# Altium PCB max10_layout.PcbDoc
Units mm, origin at the board's own origin, x right, y up, seen from the top; angles counter-clockwise.
Board outline 43 x 30 mm, 2 copper layers (Top Layer, Bottom Layer); 21 components, 17 nets, 79 pads, 86 vias.
Unrouted connection lines stored in the file: 2.
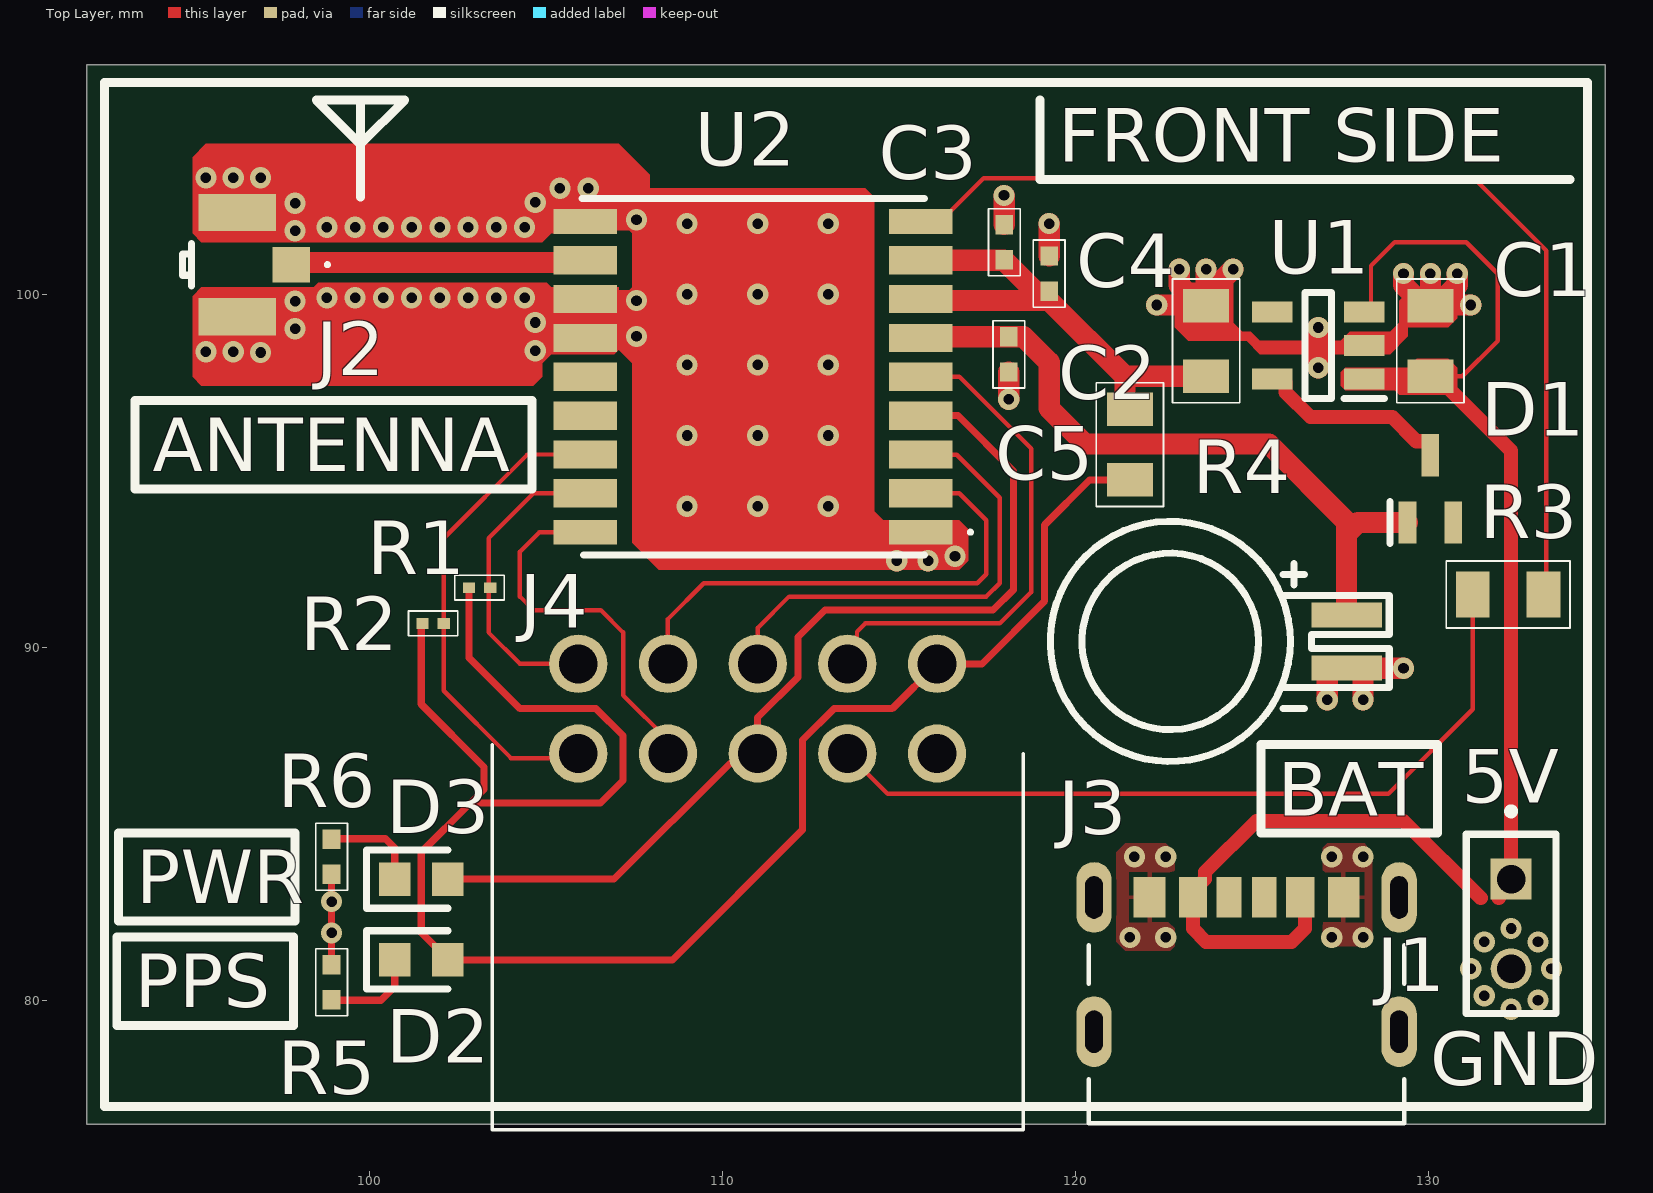
[diagram p0: Top Layer view]
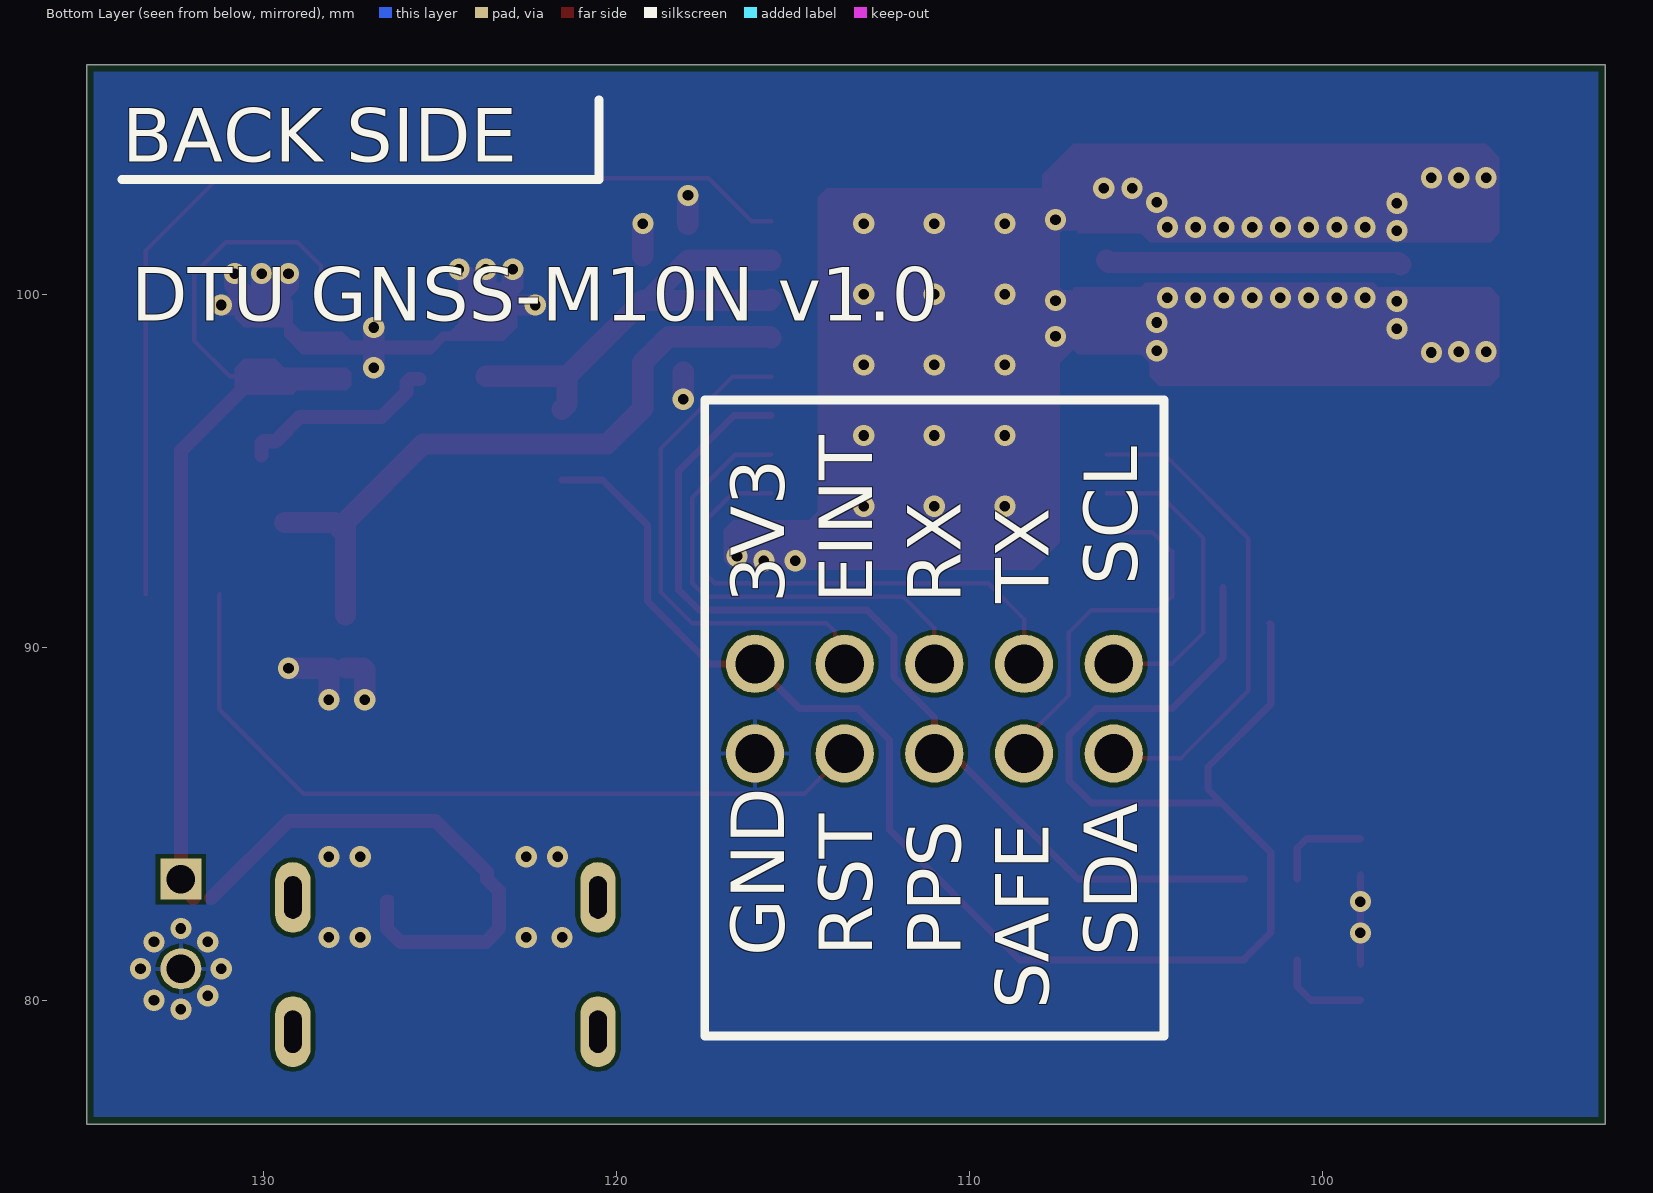
[diagram p1: Bottom Layer view, seen from below]
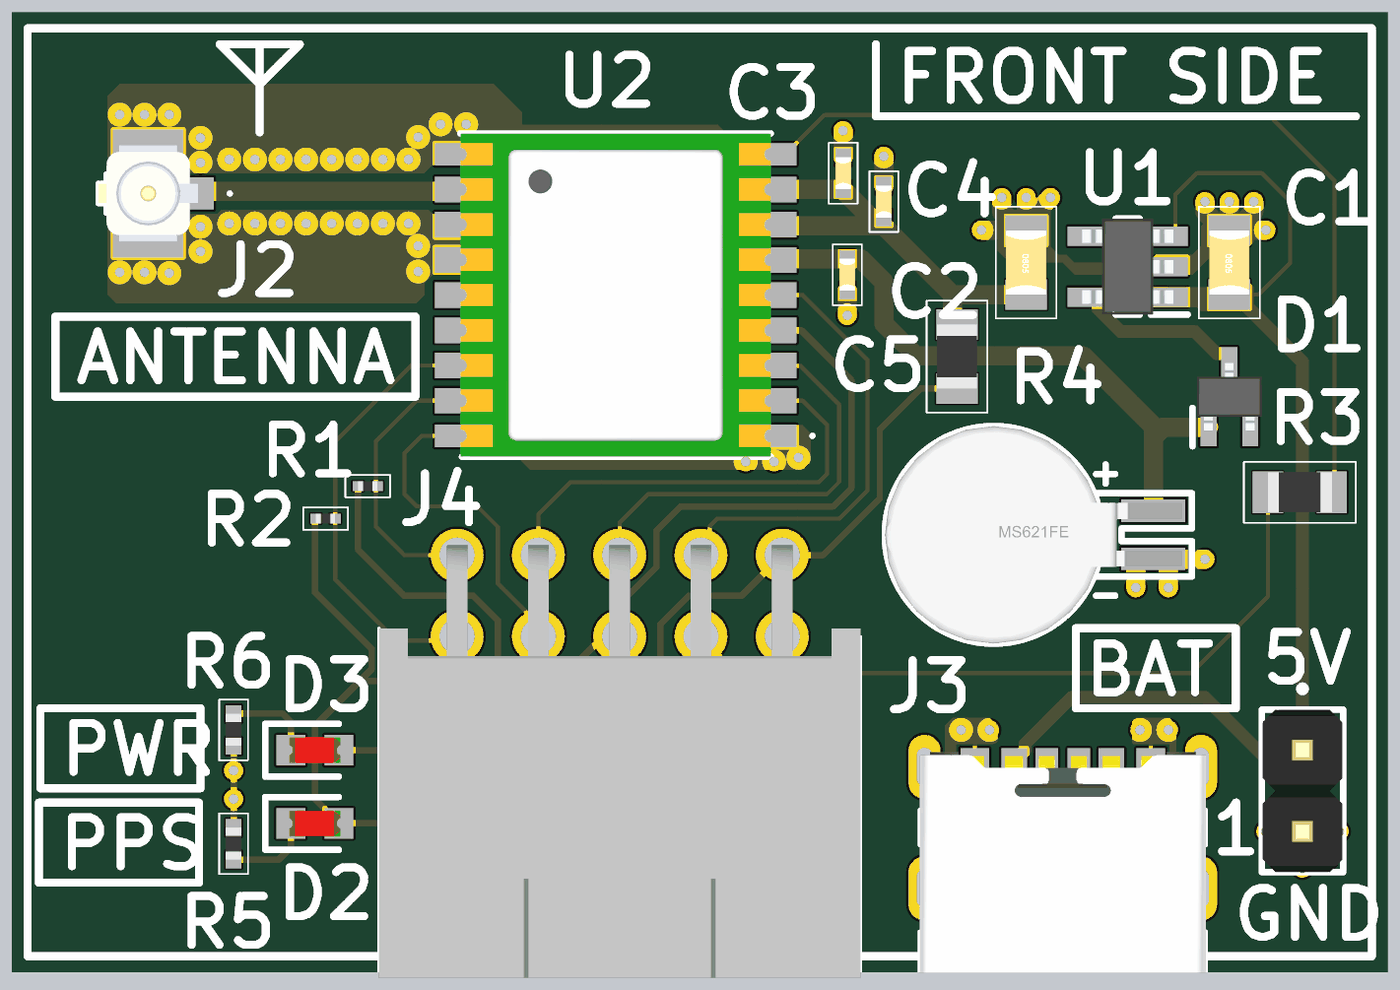
[diagram p2: 3D render of the assembled board from above, using the file's embedded part models]

## Layer stack, top to bottom
Top Solder: solder mask 0.0102, Solder Resist, Dk 3.5
Top Layer: signal copper 0.0356
Dielectric 1: dielectric 0.32, FR-4, Dk 4.8
Bottom Layer: signal copper 0.0356
Bottom Solder: solder mask 0.0102, Solder Resist, Dk 3.5

## Board outline
92,76.5 135,76.5 135,106.5 92,106.5

## Design rules (kind name [scope] priority, off if disabled: settings)
BoardOutlineClearance [All] p1: gap=0.2 ignorepadtopadclearanceinfootprint=FALSE
Clearance [All] p1: gap=0.127 ignorepadtopadclearanceinfootprint=FALSE except(0.25: Arc-Hole Track-Hole SMDPad-Hole THPad-Hole Via-Hole Fill-Hole Poly-Hole Region-Hole Text-Hole)
ComponentClearance [All] p1: gap=0.127 collisioncheckmode=3 verticalgap=0.127 showdistances=TRUE
DiffPairsRouting [All] p1: maxlimit=0.254 minlimit=0.127 mostfreqgap=0.127 toplayer_minwidth=0.127 toplayer_maxwidth=25.4 toplayer_prefwidth=0.127 bottomlayer_minwidth=0.127 bottomlayer_maxwidth=25.4 bottomlayer_prefwidth=0.127 maxuncoupledlength=12.7
Height [All] p1: minheight=0 maxheight=1816.048 prefheight=12.7
HoleSize [All] p1: absolutevalues=TRUE maxlimit=6.3 minlimit=0.3 maxpercent=80.000 minpercent=20.000
HoleToHoleClearance [All] p1: gap=0.25 allowstackedmicrovias=FALSE
MinimumAnnularRing [All] p1: minimumring=0.076
MinimumSolderMaskSliver [All] p1: minsoldermaskwidth=0
PlaneClearance [All] p1: clearance=0.127
PlaneConnect PlaneConnectPowerPads [InPadClass('PowerPads')] p1: planeconnectstyle=Direct reliefexpansion=0.508 reliefentries=4 reliefconductorwidth=0.254 reliefairgap=0.254
PlaneConnect [All] p2: pad.planeconnectstyle=Relief pad.reliefexpansion=0.3 pad.reliefentries=4 pad.reliefconductorwidth=0.127 pad.reliefairgap=0.127 via.planeconnectstyle=Direct via.reliefexpansion=0.3 via.reliefentries=4 via.reliefconductorwidth=0.127 via.reliefairgap=0.127
PolygonConnect PolygonConnectPowerPads [All vs (InPadClass('PowerPads'))] p1: connectstyle=Direct reliefconductorwidth=0.254 reliefentries=4 polygonreliefangle="90 Angle" airgapwidth=0.254
PolygonConnect [All] p2: thpad.connectstyle=Relief thpad.reliefconductorwidth=0.127 thpad.reliefentries=4 thpad.polygonreliefangle="90 Angle" thpad.airgapwidth=0.127 smdpad.connectstyle=Relief smdpad.reliefconductorwidth=0.127 smdpad.reliefentries=4 smdpad.polygonreliefangle="90 Angle" smdpad.airgapwidth=0.127 via.connectstyle=Direct via.reliefconductorwidth=0.127 via.reliefentries=4 via.polygonreliefangle="90 Angle" via.airgapwidth=0.127
RoutingVias [All] p1: holewidth=0.3 width=0.6 viastyle="Through Hole" minholewidth=0.3 minwidth=0.6 maxholewidth=0.6 maxwidth=6.6
SilkToSilkClearance [All] p1: silktosilkclearance=0
SilkToSolderMaskClearance [IsPad] p1: minsilkscreentomaskgap=0.127 clearancetoexposedcopper=TRUE
SolderMaskExpansion [All] p1: expansion=0.075 istentingtop=FALSE
SupplyNets "Schematic Supply Nets" [InNet('GND')] p1: voltage=0.000
Width [All] p1: maxlimit=25.4 minlimit=0.127 preferedwidth=0.127 minimp=50.000000 maximp=50.000000 favimp=50.000000
20 further rules are at their usual default settings.

## Classes and differential pairs
component class max10_schematic: BAT C1 C2 C3 C4 C5 D1 D2 D3 J1 J2 J3 J4 R1 R2 R3 R4 U1 U2

## Components (designator, comment, footprint, x,y, rotation, side; value= is the part's Value field where it differs from the comment)
BAT "MECH_BT" BT_MS621FE-FL11E 122.682,90.17 r0 top
C1 "CAP_0805" CAP_0805 130.048,98.679 r270 top value=1uF
C2 "CAP_0805" CAP_0805 123.698,98.679 r270 top value=1uF
C3 "CAP_0402" CAP_0402 117.983,101.473 r270 top value=0.1uF
C4 "CAP_0402" CAP_0402 119.253,100.584 r270 top value=0.1uF
C5 "CAP_0402" CAP_0402 118.11,98.298 r90 top value=1uF
D1 "HSMS-285C-BLKG" SOT65P210X100-3N 130.048,94.488 r90 top
D2 "KT-0603R" LEDC1608X70N 101.473,81.153 r0 top
D3 "KT-0603R" LEDC1608X70N 101.473,83.439 r0 top
J1 "TS-102-G-A-1" SAMTEC_TS-102-G-A-1 132.334,82.169 r270 top
J2 "U.FL-R-SMT_10_" UFLRSMT10 96.266,100.838 r90 top
J3 "UJC-HP-3-SMT-TR" CUI_UJC-HP-3-SMT-TR 124.843,82.921 r0 top
J4 "91814-3110" 918143110 105.918,86.995 r0 top
R1 "RES_0201" RES_0201 103.124,91.694 r180 top value=4.7k
R2 "RES_0201" RES_0201 101.808,90.678 r180 top value=4.7k
R3 "RES_0805" RES_0805 132.25,91.5 r180 top value=0
R4 "RES_0805" RES_0805 121.539,95.742 r90 top value=0
R5 "RES_0402" RES_0402 98.933,80.518 r270 top value=220
R6 "RES_0402" RES_0402 98.933,84.074 r90 top value=220
U1 "AP2112K-3.3TRG1" SOT95P285X140-5N 126.873,98.552 r180 top
U2 "MAX-M10M-00B" MAXM10M00B 110.871,97.663 r0 top

## Footprints (in the part's own frame and the unit in brackets; to place one, negate y for a bottom-side part, rotate by r counter-clockwise, add the part's x,y. Pads: shape width x height; smd on the part's side, far side on the other; paste and mask are expansions set on the pad)
918143110 [mm]
  round 1.65 hole 1.1: 1(0,0) 2(0,2.54) 3(2.54,0) 4(2.54,2.54) 5(5.08,0) 6(5.08,2.54) 7(7.62,0) 8(7.62,2.54) 9(10.16,0) 10(10.16,2.54)
  silkscreen extent -2.44,-10.65 12.6,0.25, body extent -2.44,-10.66 12.6,2.86, height 9.8
BT_MS621FE-FL11E [mm]
  rect 2x0.7 smd: 1(4.993,0.75) 2(4.993,-0.75)
  silkscreen extent -3.4,-3.4 6.2,3.4, body extent -3.4,-3.4 5.89,3.4, height 2.85
CAP_0402 [mm]
  rect 0.55x0.5 smd mask+0.05: 1(-0.5,0) 2(0.5,0)
  silkscreen extent -0.95,-0.45 0.95,0.45, body extent -0.5,-0.25 0.5,0.25, height 0.55
CAP_0805 [mm]
  rect 0.95x1.3 smd mask+0.05: 1(-1,0) 2(1,0)
  silkscreen extent -1.75,-0.95 1.75,0.95, body extent -1,-0.63 1,0.63, height 1.35
CUI_UJC-HP-3-SMT-TR [mm]
  rect 0.7x1.15 smd: A5(-0.5,0.005) B5(0.5,0.005)
  rect 0.8x1.15 smd: A9(1.52,0.005) B9(-1.52,0.005)
  rect 0.9x1.15 smd: A12(2.75,0.005) B12(-2.75,0.005)
  oval 1x2 hole 0.5 slot 1.2 at 90 deg: S1(-4.32,0) S2(4.32,0) S3(-4.32,-3.8) S4(4.32,-3.8)
  silkscreen extent -4.47,-6.4 4.47,-1.35, body extent -4.47,-6.44 4.47,0.46, height 3.3
LEDC1608X70N [mm]
  rect 0.9x0.95 smd: 1(-0.75,0) 2(0.75,0)
  silkscreen extent -1.55,-0.82 0.75,0.82, body extent -0.8,-0.4 0.8,0.4, height 0.53
MAXM10M00B [mm]
  rect 1.8x0.7 smd: 1(4.75,-4.4) 9(4.75,4.4) 10(-4.75,4.4) 18(-4.75,-4.4)
  rect 1.8x0.8 smd: 2(4.75,-3.3) 3(4.75,-2.2) 4(4.75,-1.1) 5(4.75,0) 6(4.75,1.1) 7(4.75,2.2) 8(4.75,3.3) 11(-4.75,3.3) 12(-4.75,2.2) 13(-4.75,1.1) 14(-4.75,0) 15(-4.75,-1.1) 16(-4.75,-2.2) 17(-4.75,-3.3)
  silkscreen extent -4.85,-5.05 6.2,5.05, body extent -4.85,-5.05 4.85,5.05, height 2.5
RES_0201 [mm]
  rect 0.35x0.3 smd mask+0.05: 1(-0.3,0) 2(0.3,0)
  silkscreen extent -0.7,-0.35 0.7,0.35, body extent -0.3,-0.15 0.3,0.15, height 0.23
RES_0402 [mm]
  rect 0.55x0.5 smd mask+0.05: 1(-0.5,0) 2(0.5,0)
  silkscreen extent -0.95,-0.45 0.95,0.45, body extent -0.5,-0.25 0.5,0.25, height 0.35
RES_0805 [mm]
  rect 0.95x1.3 smd mask+0.05: 1(-1,0) 2(1,0)
  silkscreen extent -1.75,-0.95 1.75,0.95, body extent -1,-0.63 1,0.63, height 0.5
SAMTEC_TS-102-G-A-1 [mil]
  rect 45.78x45.78 / inner round 45.78 / far side rect 45.78x45.78 hole 32: 01(-50,0)
  round 45.78 hole 32: 02(50,0)
  silkscreen extent -130,-50 100,50, body extent -100,-49 100,49, height 415
SOT65P210X100-3N [mm]
  rect 1.2x0.5 smd: 1(-0.95,0.65) 2(-0.95,-0.65) 3(0.95,0)
  silkscreen extent -1.55,1.15 -0.35,1.15, body extent -1.05,-1.01 1.05,1.01, height 1
SOT95P285X140-5N [mm]
  rect 1.15x0.6 smd: 1(-1.3,0.95) 2(-1.3,0) 3(-1.3,-0.95) 4(1.3,-0.95) 5(1.3,0.95)
  silkscreen extent -1.88,-1.5 0.38,1.5, body extent -1.43,-1.5 1.43,1.5, height 1.4
UFLRSMT10 [mm]
  rect 1x1.05 smd: 1(0,-1.525)
  rect 1.05x2.2 smd: 2(-1.475,0) 3(1.475,0)
  silkscreen extent -0.6,-2.6 0.6,1.55, body extent -1.5,-1.55 1.5,1.55, height 1.25

## Part data
BAT: "Battery"
D1: "BROADCOM LIMITED - HSMS-285C-BLKG - DIODE, SCHOTTKY, SOT-323", Manufacturer_Name="Avago Technologies", Mouser Part Number=630-HSMS-285C-BLKG, Datasheet Link=https://datasheet.datasheetarchive.com/originals/distributors/Datasheets_SAMA/a18ba574cb231f6ca9f6e17d40f360bc.pdf, Geometry.Height=1mm, Manufacturer_Part_Number=HSMS-285C-BLKG, Mouser Price/Stock=https://www.mouser.co.uk/ProductDetail/Broadcom-Avago/HSMS-285C-BLKG?qs=RQ9zk%252B50r5G0GuS6%252Bi8wOg%3D%3D
D2 D3: "Red 615~630nm 1.9~2.2V 0603 Light Emitting Diodes (LED) RoHS", Manufacturer_Name="Hubei KENTO Elec", Datasheet Link=https://datasheet.lcsc.com/szlcsc/Hubei-KENTO-Elec-KT-0603R_C2286.pdf, Geometry.Height=0.7mm, Manufacturer_Part_Number=KT-0603R
J1 J3: Package=None, Availability=Unavailable, Price=None
  J1: MF="{'manufacturer': u'Samtec Inc.'}", MP=TS-102-G-A-1
  J3: MP=UJC-HP-3-SMT-TR
J2: "U.FL (UMCC) Connector Receptacle, Male Pin 50 Ohms Surface Mount Solder", Arrow Part Number=U.FL-R-SMT(10), Manufacturer_Name=Hirose, Mouser Part Number=798-U.FL-R-SMT10, Arrow Price/Stock=https://www.arrow.com/en/products/u.fl-r-smt-10/hirose-electric?utm_currency=USD&region=nac, Datasheet Link=https://eu.mouser.com/datasheet/2/185/hiros05388_1-2269186.pdf, Geometry.Height=1.45mm, Manufacturer_Part_Number=U.FL-R-SMT(10), Mouser Price/Stock=https://www.mouser.co.uk/ProductDetail/Hirose-Connector/U.FL-R-SMT10?qs=Ux3WWAnHpjBT1CWD8UMEMQ%3D%3D
J4: "2.54mm Pitch C-Grid III Dual Row Right-Angle Shrouded Header, 10 Circuits, Tin (Sn) over Nickel (Ni)", Manufacturer_Name=Molex, Mouser Part Number=538-91814-3110, Datasheet Link=https://www.molex.com/pdm_docs/sd/918143110_sd.pdf, Geometry.Height=9.75mm, Manufacturer_Part_Number=91814-3110, Mouser Price/Stock=https://www.mouser.co.uk/ProductDetail/Molex/91814-3110?qs=foBNLhhmJWj4K%2F9NKQ%252B3vQ%3D%3D
U1: "600mA 3.3V LDO Regulator Enable SOT23-5 DiodesZetex AP2112K-3.3TRG1, LDO Voltage Regulator, 3.3 V +/-1.5%, 2.5  6 Vin, 5-Pin SOT-23", Manufacturer_Name="Diodes Incorporated", Mouser Part Number=621-AP2112K-3.3TRG1, Arrow Part Number=AP2112K-3.3TRG1, Arrow Price/Stock=https://www.arrow.com/en/products/ap2112k-3.3trg1/diodes-incorporated?utm_currency=USD&region=nac, Datasheet Link=https://www.diodes.com//assets/Datasheets/AP2112.pdf, Geometry.Height=1.4mm, Manufacturer_Part_Number=AP2112K-3.3TRG1, Mouser Price/Stock=https://www.mouser.co.uk/ProductDetail/Diodes-Incorporated/AP2112K-3.3TRG1?qs=x6A8l6qLYDDPYHosCdzh%2FA%3D%3D
U2: "GPS Modules u-blox M10 GNSS LCC module, firmware in ROM, crystal oscillator", Manufacturer_Name=u-blox, Mouser Part Number=377-MAX-M10M-00B, Arrow Part Number=MAX-M10M-00B, Arrow Price/Stock=https://www.arrow.com/en/products/max-m10m-00b/u-blox?utm_currency=USD&region=nac, Datasheet Link=https://content.u-blox.com/sites/default/files/documents/MAX-M10M_IntegrationManual_UBX-22038241.pdf, Geometry.Height=2.7mm, Manufacturer_Part_Number=MAX-M10M-00B, Mouser Price/Stock=https://www.mouser.co.uk/ProductDetail/u-blox/MAX-M10M-00B?qs=A6eO%252BMLsxmQGh8%2FJ1ZmexA%3D%3D

## Via types
v1: diameter 0.6, hole 0.3, Top Layer to Bottom Layer, 86 vias

## Nets (pads, with @x,y where several pads share a name; then routed paths per layer and width w, separated by ;. In a path a pad name is that pad's centre, name@x,y a point inside that pad or via, vN(x,y) a via of type N, cw(c..) or ccw(c..) an arc to the next point about the centre after c; other vN are vias at no path point)
+3V3: C2.2 C3.2 C4.2 D1.3 R4.2 U1.5 U2.7 U2.8 | length 19.7
  Top Layer w0.4: U1.5 125.848,97.602 125.948,97.502 125.948,97.227 126.655,96.52 128.966,96.52 129.648,95.838 129.998,95.838 130.048,95.788 D1.3
  Top Layer w0.6: U2.7 115.662,99.822 C4.2@119.114,99.822 ; U2.8 117.973,100.963 C4.2@119.114,99.822 ; R4.2 121.396,96.885 121.396,97.679 ; C2.2 121.396,97.679 ; C4.2@119.114,99.822 119.253,99.822 121.396,97.679
EXTINT: J4.8 U2.5 | length 14.5
  Top Layer w0.127: J4.8 113.812,89.809 113.812,90.444 114.046,90.678 117.856,90.678 118.745,91.567 118.745,95.631 116.713,97.663 U2.5
GND: BAT.2 C1.1 C2.1 C3.1 C4.1 C5.1 J1.02 J2.2 J2.3 J3.A12 J3.B12 J4.9 R5.1 R6.1 U1.2 U2.1 U2.10 U2.12 U2.13 | length 32.3
  Top Layer w0.2: R5.1 R6.1
  Top Layer w0.6: v1(104.4,99.9) 105.945,99.9 106.023,99.822 v1(107.569,99.822) ; v1(104.4,101.9) 104.523,102.023 106.036,102.023 106.121,102.108 v1(107.569,102.108) ; v1(104.7,99.2) 105.037,98.863 105.521,98.863 105.578,98.806 v1(107.569,98.806) ; v1(114.935,92.456) 114.935,92.769 115.021,92.855 115.021,93.213 115.071,93.263 116.171,93.263 116.586,92.848 v1(116.586,92.583) ; U2.1@115.774,93.263 115.824,93.213 v1(115.824,92.456) ; v1(117.975,102.8) 117.983,102.792 C3.1 ; v1(118.11,97.028) C5.1 ; v1(119.25,102) 119.253,101.997 C4.1 ; v1(122.301,99.695) 123.682,99.695 C2.1 ; v1(122.936,100.711) 122.936,100.266 123.523,99.679 C2.1 ; v1(123.698,100.711) 123.698,100.195 ; v1(124.46,100.711) 123.944,100.195 123.698,100.195 ; v1(126.873,97.917) v1(126.873,99.06) ; v1(127.127,88.519) 127.127,89.37 127.177,89.42 BAT.2 ; BAT.2@128.093,89.408 v1(129.286,89.408) ; BAT.2@128.093,89.42 128.143,89.37 v1(128.143,88.519) ; v1(129.286,100.584) 129.286,100.266 129.873,99.679 C1.1 ; v1(130.048,100.584) C1.1 ; C1.1@130.223,99.679 130.81,100.266 v1(130.81,100.584) ; v1(131.191,99.695) 130.064,99.695 C1.1 ; C2.1 123.698,100.195
  other v1: 132.334,79.756 133.096,80.01 131.572,80.137 131.191,80.899 133.477,80.899 131.572,81.661 133.096,81.661 121.539,81.788 122.555,81.788 127.254,81.788 128.143,81.788 98.933,81.915 132.334,82.042 98.933,82.804 121.666,84.074 122.555,84.074 127.254,84.074 128.143,84.074 109,94 111,94 113,94 109,96 111,96 113,96 109,98 111,98 113,98 96.925,98.35 95.375,98.375 96.15,98.375 104.7,98.4 97.9,99.025 97.9,99.8 98.8,99.9 99.6,99.9 100.4,99.9 101.2,99.9 102,99.9 102.8,99.9 103.6,99.9 109,100 111,100 113,100 97.9,101.8 98.8,101.9 99.6,101.9 100.4,101.9 101.2,101.9 102,101.9 102.8,101.9 103.6,101.9 109,102 111,102 113,102 97.9,102.575 104.7,102.6 105.4,103 106.2,103 95.375,103.3 96.15,103.3 96.925,103.3
NetD2_1: D2.1 R5.2 | length 2.7
  Top Layer w0.2: R5.2 98.941,80.01 100.33,80.01 100.723,80.403 D2.1
NetD2_2: D2.2 J4.10 R1.2 R2.2 R4.1 | length 52.1
  Top Layer w0.2: R2.2 101.473,90.643 101.473,88.392 103.251,86.614 103.251,85.979 102.87,85.598 ; R1.2 102.824,89.708 104.267,88.265 106.426,88.265 107.188,87.503 107.188,86.233 106.553,85.598 102.87,85.598 ; R4.1 120.396,94.742 119.126,93.472 119.126,91.313 117.348,89.535 J4.10 114.808,88.265 113.157,88.265 112.268,87.376 112.268,84.836 108.585,81.153 D2.2 102.223,81.178 101.473,81.928 101.473,84.201 102.87,85.598
NetD3_1: D3.1 R6.2 | length 2.8
  Top Layer w0.2: R6.2 98.941,84.582 100.457,84.582 100.723,84.316 D3.1
NetJ4_7: J4.7 R3.2 | length 22.4
  Top Layer w0.127: J4.7 114.681,85.852 128.852,85.852 131.25,88.25 R3.2
PULSE: D3.2 J4.5 U2.4 | length 27.3
  Top Layer w0.2: D3.2 106.934,83.439 110.213,86.718 110.721,86.718 J4.5 110.998,88.011 112.141,89.154 112.141,90.297 112.903,91.059 117.665,91.059 118.237,91.631 118.237,94.996 116.67,96.563 U2.4
RF_IN: J2.1 U2.11 | length 8.4
  Top Layer w0.6: J2.1 97.853,100.9 106.058,100.9 U2.11
RST_N: R3.1 U2.9 | length 28.8
  Top Layer w0.127: U2.9 116.171,102.063 117.399,103.29 131.279,103.29 133.334,101.235 R3.1@133.334,91.5
RX: J4.6 U2.3 | length 13.6
  Top Layer w0.127: J4.6 110.998,90.551 111.887,91.44 117.475,91.44 117.856,91.821 117.856,94.234 116.637,95.453 115.631,95.453 U2.3
SAFEBOOT_N: J4.3 U2.18 | length 10.6
  Top Layer w0.127: U2.18 104.82,93.263 104.267,92.71 104.267,91.44 104.648,91.059 106.553,91.059 107.188,90.424 107.188,88.646 108.458,87.376 J4.3
SCL: J4.2 R1.1 U2.17 | length 8.8
  Top Layer w0.127: J4.2 104.267,89.535 103.378,90.424 103.378,93.091 104.65,94.363 U2.17
SDA: J4.1 R2.1 U2.16 | length 14
  Top Layer w0.127: J4.1 105.791,86.868 104.013,86.868 102.108,88.773 102.108,93.091 104.48,95.463 U2.16
TX: J4.4 U2.2 | length 14.5
  Top Layer w0.127: J4.4 108.458,90.805 109.474,91.821 117.221,91.821 117.475,92.075 117.475,93.599 116.711,94.363 U2.2
VBAT: BAT.1 C5.2 D1.1 U2.6 | length 19.5
  Top Layer w0.6: U2.6 115.656,98.798 C5.2 118.529,98.798 119.253,98.074 119.253,96.774 120.269,95.758 125.476,95.758 127.675,93.559 127.675,93.218 ; BAT.1 127.675,93.218 ; D1.1 127.995,93.538 127.675,93.218
VIN: C1.2 J1.01 J3.A9 J3.B9 U1.1 U1.3 | length 41.1
  Top Layer w0.127: J3.A9 J3.A9@126.492,82.797 ; U1.3 128.366,99.695 128.366,100.807 129.032,101.473 131.064,101.473 131.953,100.584 131.953,98.679 130.953,97.679 130.223,97.679 130.136,97.679 C1.2
  Top Layer w0.4: J3.A9@126.492,82.797 126.492,82.042 126.111,81.661 123.698,81.661 123.323,82.036 J3.B9 123.323,83.101 123.666,83.444 123.666,83.636 125.12,85.09 129.286,85.09 131.474,82.902 ; C1.2@130.223,97.679 132.334,95.568 J1.01 131.982,83.087 J1.01@131.982,82.902
pads on no net: D1.2 J3.A5 J3.B5 J3.S1 J3.S2 J3.S3 J3.S4 U1.4 U2.14 U2.15

## Polygon pours and split planes (outlines as drawn)
GND on Top Layer "GND_L01_P000" (solid, pour order 0): 128.397,84.138 128.397,81.788 128.143,81.534 127.127,81.534 127,81.661 127,82.296 127.127,82.423 127.127,83.566 127,83.693 127,84.328 127.127,84.455 128.185,84.455
GND on Top Layer "GND_L01_P001" (solid, pour order 1): 122.809,81.534 122.682,81.407 121.412,81.407 121.158,81.661 121.158,84.201 121.412,84.455 122.555,84.455 122.809,84.201 122.809,83.693 122.555,83.439 122.555,82.296 122.809,82.042 122.809,81.915
GND on Bottom Layer "GND_L02_P004" (solid, pour order 4): 92,106.5 135,106.5 135,76.5 92,76.5

## Other copper
Top Layer:
  region net GND: 105.156,100.203 105.029,100.33 98.552,100.33 98.425,100.203 95.25,100.203 94.996,99.949 94.996,98.933 94.996,98.425 95.123,98.298 106.934,98.298 107.061,98.425 107.061,100.203
  region net GND: 106.934,101.727 105.156,101.727 104.902,101.473 95.25,101.473 94.996,101.727 94.996,103.886 95.377,104.267 106.426,104.267 106.934,103.759
  region net GND: 129.54,100.203 130.556,100.203 130.81,99.949 130.81,99.314 130.556,99.06 129.413,99.06 129.413,98.806 128.905,98.298 125.222,98.298 124.841,98.679 123.19,98.679 122.809,99.06 122.809,99.949 123.19,100.33 124.46,100.33 124.46,99.187 124.714,98.933 124.968,98.933 125.222,98.679 127.508,98.679 127.762,98.933 128.905,98.933 129.159,99.187 129.159,99.822
  region net GND: 107.061,98.425 107.442,98.044 107.442,92.964 108.204,92.202 116.713,92.202 116.967,92.456 116.967,93.345 116.713,93.599 114.554,93.599 114.3,93.853 114.3,102.743 114.046,102.997 107.95,102.997 107.95,103.378 107.061,104.267 106.426,104.267 106.426,103.759 106.934,103.251 106.934,102.362 107.188,102.108 107.188,101.981 107.442,101.727 107.442,100.203 107.061,99.822
  region net GND: 105.156,98.298 104.902,98.044 104.902,97.663 104.648,97.409 95.25,97.409 94.996,97.663 94.996,98.425 105.156,98.425
  region net VIN: 130.81,97.155 129.159,97.155 129.032,97.282 127.635,97.282 127.508,97.409 127.508,97.79 127.635,97.917 129.413,97.917 129.667,98.171 130.556,98.171 130.81,97.917

## Silkscreen, mask and mechanical layers (free items; w line width, h text height)
Top Overlay:
  lines w0.254: 99.75,102.75 99.75,105.5 ; 99.75,104.125 99.75,104.25 ; 119,105.5 119,103.25 119.75,103.25 134,103.25 ; 99.75,104.25 98.5,105.5 101,105.5 99.75,104.25 ; 92.5,77 134.5,77 134.5,106 92.5,106 92.5,77 ; 92.85,79.3 97.85,79.3 97.85,81.8 92.85,81.8 92.85,79.3 ; 92.9,82.25 97.9,82.25 97.9,84.75 92.9,84.75 92.9,82.25 ; 93.365,94.488 104.615,94.488 104.615,96.988 93.365,96.988 93.365,94.488 ; 125.25,84.75 130.25,84.75 130.25,87.25 125.25,87.25 125.25,84.75
  text "FRONT SIDE" at 119.504,103.754 h1.52
  text "ANTENNA" at 93.869,94.992 h1.52
  text "5V" at 130.937,85.598 h1.52
  text "PWR" at 93.404,82.754 h1.52
  text "PPS" at 93.354,79.804 h1.52
  text "GND" at 130.048,77.597 h1.52
Bottom Overlay:
  lines w0.254: 120.5,105.5 120.5,103.25 134,103.25 ; 104.5,79 117.5,79 117.5,97 104.5,97 104.5,79
  text "BACK SIDE" at 133.996,103.754 h1.52
  text "DTU GNSS-M10N v1.0" at 133.746,99.254 h1.52
  text "SCL" at 105.254,91.754 h1.52 r270
  text "TX" at 107.754,91.254 h1.52 r270
  text "RX" at 110.254,91.254 h1.52 r270
  text "EINT" at 112.754,91.254 h1.52 r270
  text "3V3" at 115.254,91.254 h1.52 r270
  text "SDA" at 105.254,81.254 h1.52 r270
  text "PPS" at 110.254,81.254 h1.52 r270
  text "RST" at 112.754,81.254 h1.52 r270
  text "GND" at 115.254,81.254 h1.52 r270
  text "SAFE" at 107.754,79.754 h1.52 r270